# Altium PCB 01_giris.PcbDoc
Units mm, origin at the board's own origin, x right, y up, seen from the top; angles counter-clockwise.
Board outline 45 x 45 mm, 2 copper layers (Top Layer, Bottom Layer), stack 1.571 mm thick; 35 components, 24 nets, 171 pads, 32 vias.
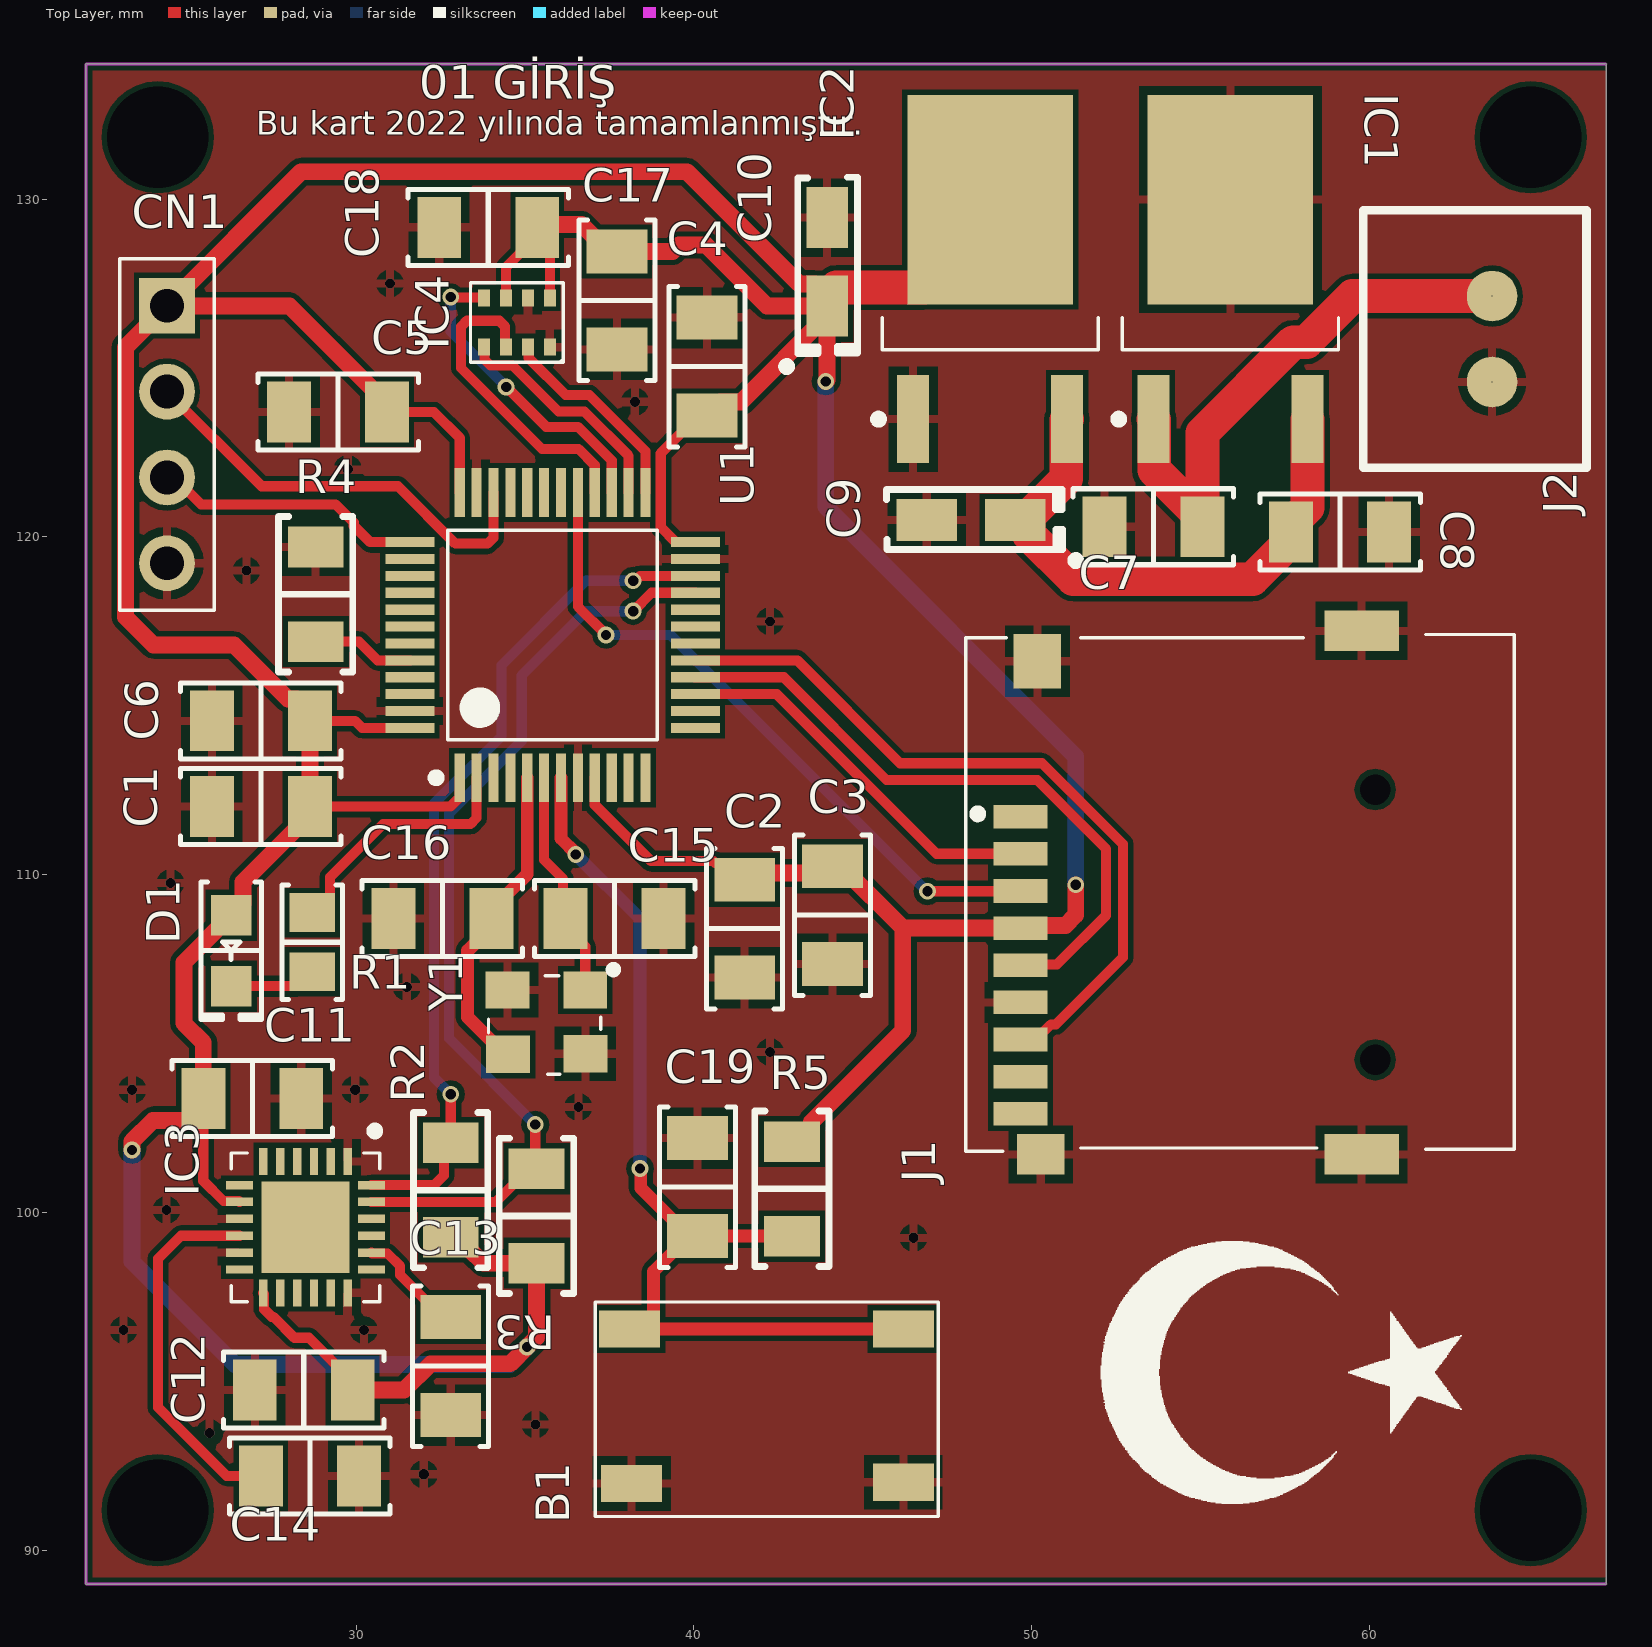
[diagram p0: Top Layer view]
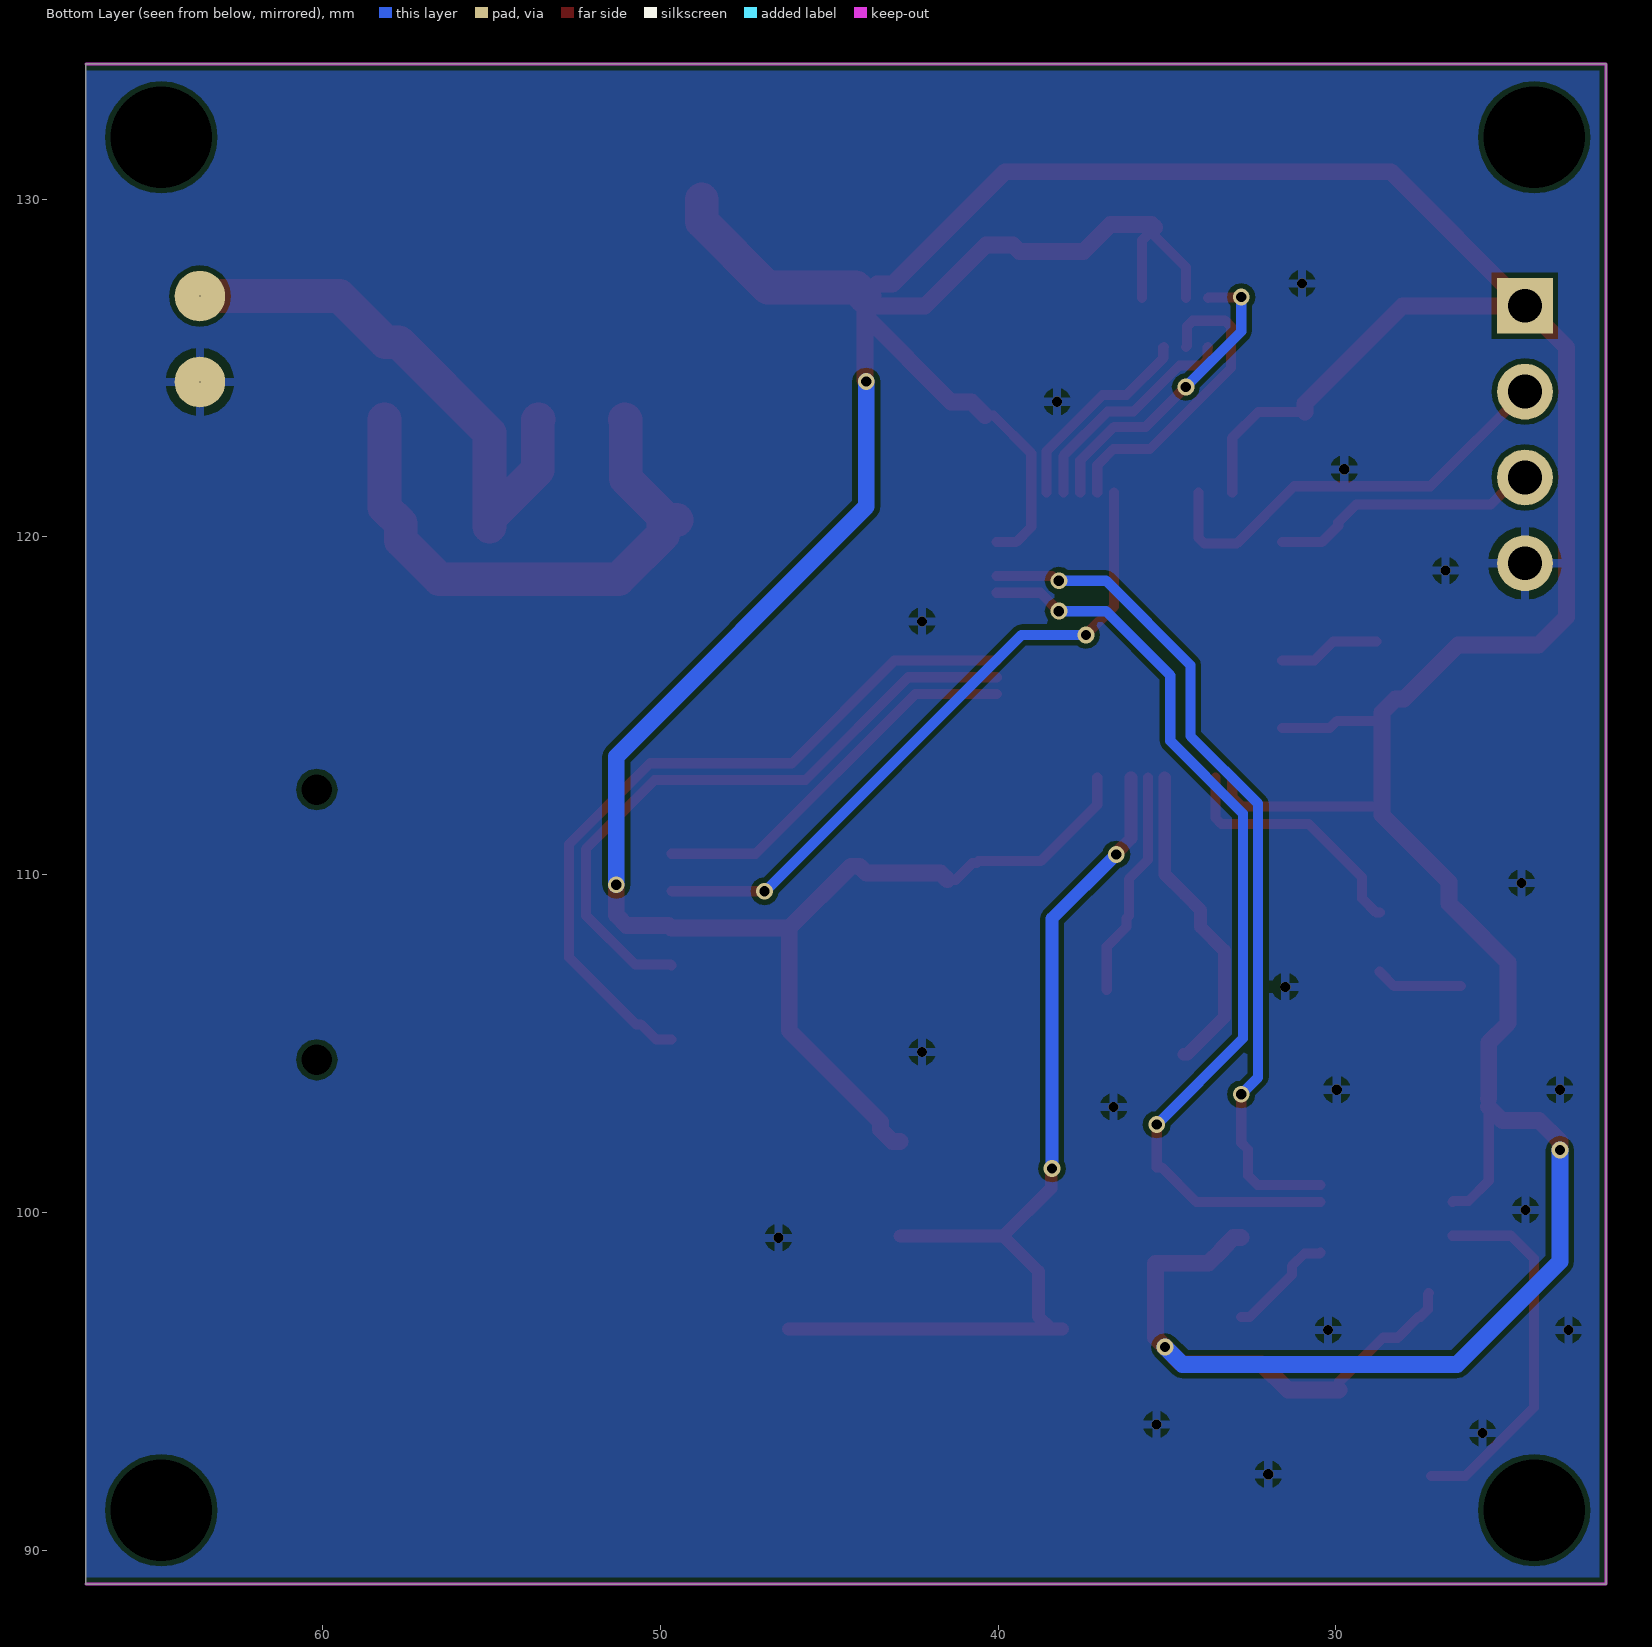
[diagram p1: Bottom Layer view, seen from below]
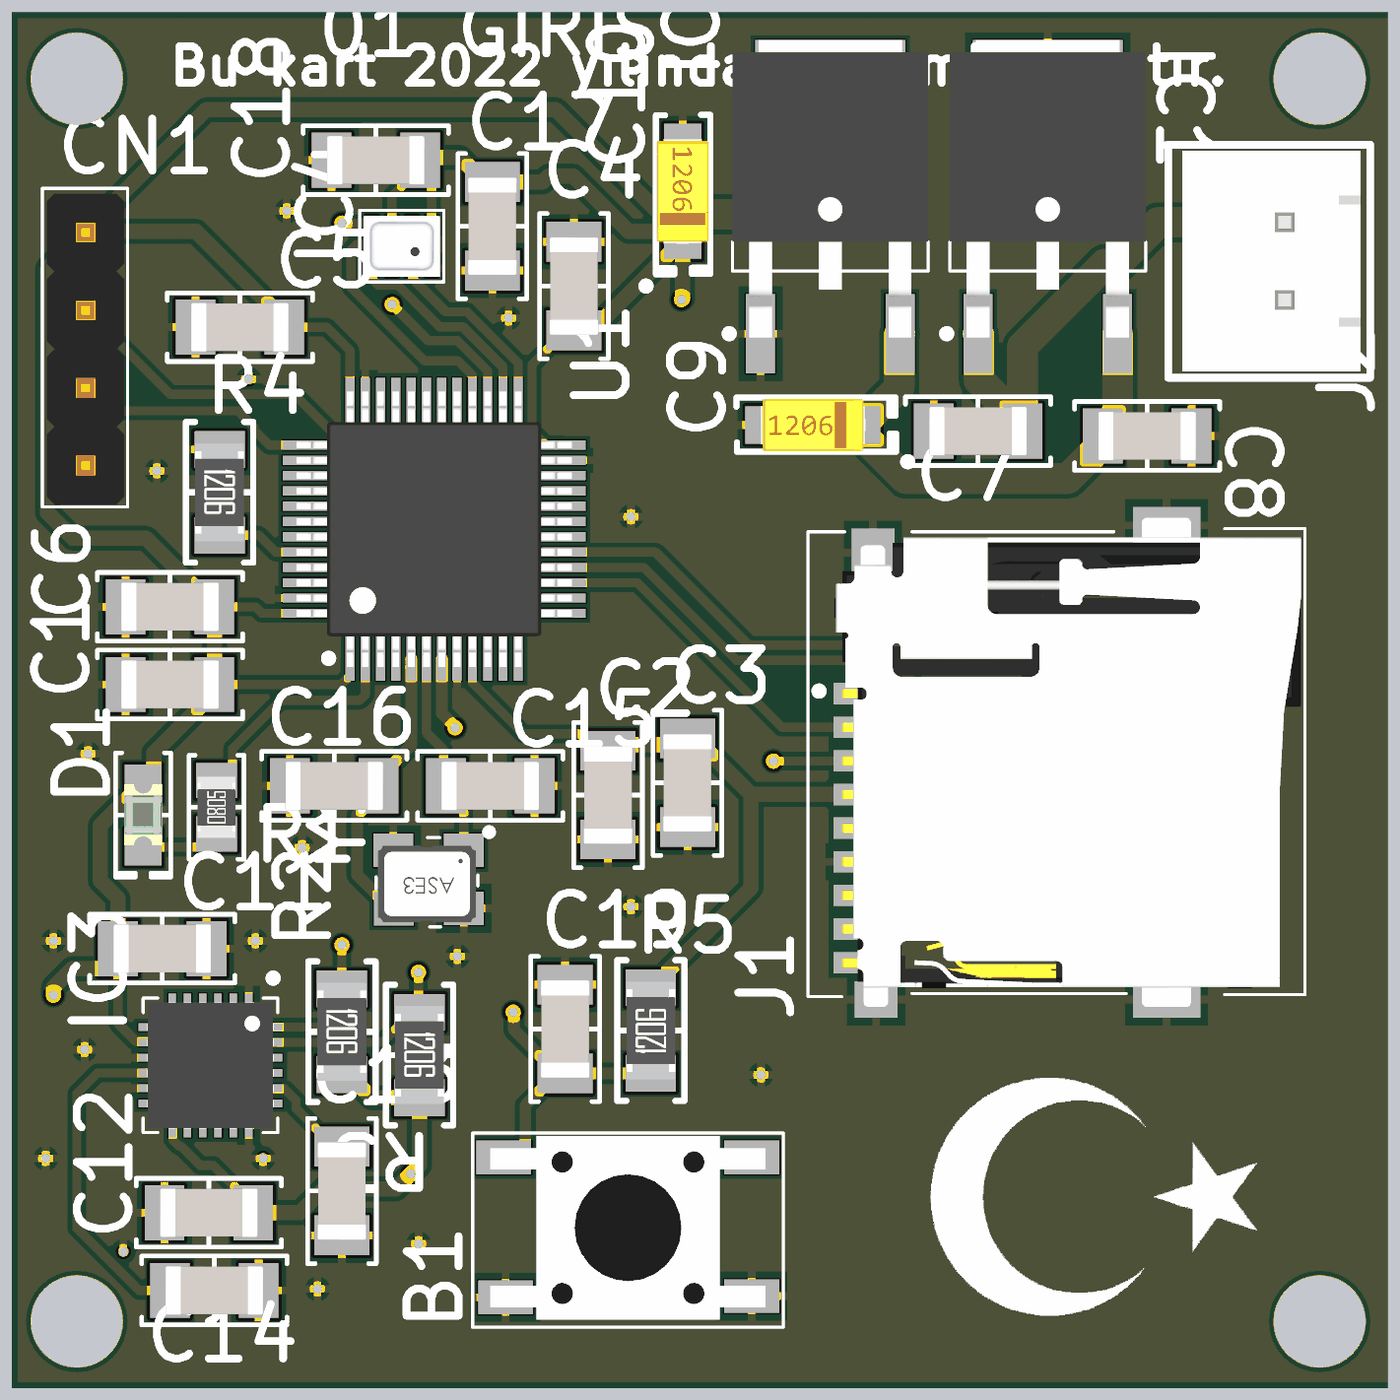
[diagram p2: 3D render of the assembled board from above, using the file's embedded part models]

## Layer stack, top to bottom
Top Solder: solder mask 0.0102, Solder Resist, Dk 3.5
Top Layer: signal copper 0.0356
Dielectric 1: dielectric 1.5, FR-4, Dk 4.8
Bottom Layer: signal copper 0.0356
Bottom Solder: solder mask 0.0102, Solder Resist, Dk 3.5

## Board outline
22,89 67,89 67,134 22,134

## Design rules (kind name [scope] priority, off if disabled: settings)
Clearance [All] p1: gap=0.152 ignorepadtopadclearanceinfootprint=FALSE
HoleSize [All] p1: absolutevalues=TRUE maxlimit=5 minlimit=0 maxpercent=80.000 minpercent=20.000
MinimumSolderMaskSliver [All] p1: minsoldermaskwidth=0.05
PolygonConnect [All] p1: connectstyle=Relief reliefconductorwidth=0.254 reliefentries=4 polygonreliefangle="90 Angle" airgapwidth=0.254
RoutingVias [All] p1: holewidth=0.75 width=0.8 viastyle="Through Hole" minholewidth=0.3 minwidth=0.5 maxholewidth=0.1 maxwidth=2
SilkToSilkClearance [All] p1: silktosilkclearance=0
SilkToSolderMaskClearance [IsPad] p1: minsilkscreentomaskgap=0 clearancetoexposedcopper=TRUE
SolderMaskExpansion [All] p1: expansion=0.102 istentingtop=FALSE
Width [All] p1: maxlimit=2 minlimit=0.152 preferedwidth=0.3 minimp=50.000000 maximp=50.000000 favimp=50.000000
26 further rules are at their usual default settings.

## Components (designator, comment, footprint, x,y, rotation, side; value= is the part's Value field where it differs from the comment)
B1 "PUSH BUTTON 2" "PUSH BUTTON 2" 41.9,94.3 r0 top
C1 "0.1 µF" "CAP 1206_3216 - 0.8MM" 27.178,112.014 r0 top
C2 "10000pF" "CAP 1206_3216 - 1.0MM" 41.5,108.4 r90 top
C3 "1 µF" "CAP 1206_3216 - 0.8MM" 44.1,108.8 r90 top
C4 "0.1 µF" "CAP 1206_3216 - 0.8MM" 40.386,125.042 r270 top
C5 "0.1 µF" "CAP 1206_3216 - 0.8MM" 29.464,123.698 r0 top
C6 "47µF" "CAP 1206_3216 - 1.8MM" 27.178,114.554 r0 top
C7 "0.33µF" "CAP 1206_3216 - 1.0MM" 53.6,120.3 r0 top
C8 "0.1 µF" "CAP 1206_3216 - 0.8MM" 59.129,120.142 r180 top
C9 "10µF" "CAP POL 1206_3216" 48.2,120.5 r180 top
C10 "10µF" "CAP POL 1206_3216" 43.942,128.143 r90 top
C11 "10000pF" "CAP 1206_3216 - 1.0MM" 26.924,103.378 r180 top
C12 "0.1 µF" "CAP 1206_3216 - 0.8MM" 28.448,94.742 r180 top
C13 "2200 pF" "CAP 1206_3216 - 0.8MM" 32.798,95.453 r270 top
C14 "0.1 µF" "CAP 1206_3216 - 0.8MM" 28.628,92.202 r0 top
C15 "16 pF" "CAP 1206_3216 - 0.8MM" 37.65,108.7 r0 top
C16 "16 pF" "CAP 1206_3216 - 0.8MM" 32.55,108.7 r180 top
C17 "0.1 µF" "CAP 1206_3216 - 0.8MM" 37.719,127 r90 top
C18 "0.1 µF" "CAP 1206_3216 - 0.8MM" 33.909,129.159 r0 top
C19 "0.1 µF" "CAP 1206_3216 - 0.8MM" 40.1,100.75 r270 top
CN1 "CONN4 MALE 1" "CONN4 MALE 1" 21.86,123.03 r90 top
D1 "Green" "LED 0805_2012 GREEN" 26.3,107.75 r270 top
IC1 "L7805" DPAK 55.88,127.635 r90 top
IC2 "LD108633" DPAK 48.768,127.635 r90 top
IC3 "MPU6050" QFN 28.5,99.562 r270 top
IC4 "BMP280" BMP280 34.909,126.3 r270 top
J1 "MIKRO SD CARD CONNECTOR" "MICRO SD CARD CONNECTOR" 56.4,109.8 r90 top
J2 "JST2" JST2 63.5,125.857 r270 top
R1 "330 Ohms" "RES 0805_2012" 28.7,108 r90 top
R2 "4.7 kOhms" "RES 1206_3216" 32.798,100.66 r270 top
R3 "4.7 kOhms" "RES 1206_3216" 35.338,99.898 r270 top
R4 "10 kOhms" "RES 1206_3216" 28.8,118.3 r270 top
R5 "10 kOhms" "RES 1206_3216" 42.9,100.7 r90 top
U1 "STM32F103 2" LQFP48 35.814,117.094 r90 top
Y1 "OSCILLATOR" OSCILLATOR 35.6,105.5 r180 top

## Footprints (in the part's own frame and the unit in brackets; to place one, negate y for a bottom-side part, rotate by r counter-clockwise, add the part's x,y. Pads: shape width x height; smd on the part's side, far side on the other; paste and mask are expansions set on the pad)
BMP280 [mm]
  rect 0.5x0.35 smd: 1(0.675,0.825) 2(0.675,0.175) 3(0.675,-0.475) 4(0.675,-1.125) 5(-0.775,-1.125) 5(-0.775,-1.125) 6(-0.775,-0.475) 7(-0.775,0.175) 8(-0.775,0.825)
  silkscreen extent -1.22,-1.53 1.12,1.22, body extent -1.05,-1.4 0.95,1.1, height 0.95
"CAP 1206_3216 - 0.8MM" [mm] "Chip Capacitor, 2-Leads, Body 3.25x1.60mm, IPC Medium Density"
  rect 1.3x1.8 smd: 1(-1.45,0) 2(1.45,0)
  silkscreen extent -2.37,-1.12 2.37,1.12, body extent -1.6,-0.8 1.6,0.8, height 0.8
"CAP 1206_3216 - 1.0MM" [mm] "Chip Capacitor, 2-Leads, Body 3.25x1.60mm, IPC Medium Density"
  rect 1.3x1.8 smd: 1(-1.45,0) 2(1.45,0)
  silkscreen extent -2.37,-1.12 2.37,1.12, body extent -1.6,-0.8 1.6,0.8, height 1
"CAP 1206_3216 - 1.8MM" [mm] "Chip Capacitor, 2-Leads, Body 3.25x1.60mm, IPC Medium Density"
  rect 1.3x1.8 smd: 1(-1.45,0) 2(1.45,0)
  silkscreen extent -2.37,-1.12 2.37,1.12, body extent -1.6,-0.8 1.6,0.8, height 1.8
"CAP POL 1206_3216" [mm] "Molded Capacitor, 2-Leads, Body 3.20x1.6mm, IPC Medium Density"
  rect 1.8x1.23 smd: 1(-1.31,0) 2(1.31,0)
  silkscreen extent -3.22,-0.9 2.5,1.32, body extent -1.72,-0.85 1.71,0.85, height 1.7
"CONN4 MALE 1" [mm] "4 PIN 2.54MM"
  rect 1.65x1.65 hole 1 mask+0: 1(3.81,-2.54)
  round 1.65 hole 1 mask+0: 2(1.27,-2.54) 3(-1.27,-2.54) 4(-3.81,-2.54)
  silkscreen extent -5.21,-3.94 5.21,-1.14, body extent -5.13,-3.83 5.03,-1.29, height 8.89
DPAK [mm] "D-PAK, 3-Pads, Body 6,20x6,56mm (max), IPC Medium Density"
  rect 2.6x0.95 smd mask+0.05: 1(-4.15,2.28) 2(-4.15,-2.28)
  rect 6.2x4.9 smd mask+0.05: 3(2.35,0)
  silkscreen extent -4.27,-3.2 -1.15,3.43, body extent -4.27,-3.2 5.45,3.2, height 3.4
JST2 [mm] "2 PIN 2.54MM"
  round 1.5 hole 0.001 mask+0.102: 1(-1.27,0.127) 2(1.27,0.127)
  silkscreen extent -3.81,-3.68 3.81,2.92, body extent -3.61,-3.23 3.61,2.62, height 7.21
"LED 0805_2012 GREEN" [mm] "Chip Diode, 2-Leads, Body 2.00x1.25mm, IPC Medium Density"
  rect 1.2x1.2 smd: 1(-1.05,0) 2(1.05,0)
  silkscreen extent -2.03,-0.9 2.03,0.9, body extent -1,-0.62 1,0.63, height 0.9
LQFP48 [mm] "TSQFP, 48-Leads, Body 7,00x7,00mm, Pitch 0,50mm, IPC Medium Density"
  rect 1.45x0.3 smd mask+0.05: 1(-4.225,2.75) 2(-4.225,2.25) 3(-4.225,1.75) 4(-4.225,1.25) 5(-4.225,0.75) 6(-4.225,0.25) 7(-4.225,-0.25) 8(-4.225,-0.75) 9(-4.225,-1.25) 10(-4.225,-1.75) 11(-4.225,-2.25) 12(-4.225,-2.75) 25(4.225,-2.75) 26(4.225,-2.25) 27(4.225,-1.75) 28(4.225,-1.25) 29(4.225,-0.75) 30(4.225,-0.25) 31(4.225,0.25) 32(4.225,0.75) 33(4.225,1.25) 34(4.225,1.75) 35(4.225,2.25) 36(4.225,2.75)
  rect 0.3x1.45 smd mask+0.05: 13(-2.75,-4.225) 14(-2.25,-4.225) 15(-1.75,-4.225) 16(-1.25,-4.225) 17(-0.75,-4.225) 18(-0.25,-4.225) 19(0.25,-4.225) 20(0.75,-4.225) 21(1.25,-4.225) 22(1.75,-4.225) 23(2.25,-4.225) 24(2.75,-4.225) 37(2.75,4.225) 38(2.25,4.225) 39(1.75,4.225) 40(1.25,4.225) 41(0.75,4.225) 42(0.25,4.225) 43(-0.25,4.225) 44(-0.75,4.225) 45(-1.25,4.225) 46(-1.75,4.225) 47(-2.25,4.225) 48(-2.75,4.225)
  silkscreen extent -4.35,-3.1 3.1,3.57, body extent -4.5,-4.5 4.5,4.5, height 1.6
"MICRO SD CARD CONNECTOR" [mm]
  rect 0.7x1.6 smd paste+0 mask+0: 1(1.918,6.735) 2(0.818,6.735) 3(-0.282,6.735) 4(-1.382,6.735) 5(-2.482,6.735) 6(-3.582,6.735) 7(-4.682,6.735) 8(-5.782,6.735) Cd(-6.882,6.735)
  rect 1.2x1.4 smd paste+0 mask+0: 10(-8.082,6.135)
  rect 1.6x1.4 smd paste+0 mask+0: 11(6.518,6.235)
  rect 1.2x2.2 smd paste+0 mask+0: 12(-8.082,-3.365) 13(7.418,-3.365)
  round 0 hole 0.9 unplated paste-1000 mask+0: ""(-5.282,-3.765) ""(2.718,-3.765)
  silkscreen extent -7.99,-7.89 7.31,8.36, body extent -8.33,-7.76 7.67,7.49, height 1.85
OSCILLATOR [mm] "8MHZ 12.5pF"
  rect 1.3x1.1 smd mask+0.05: 1(-1.181,-1.09) 2(1.119,-1.09) 3(1.103,0.817) 4(-1.186,0.801)
  silkscreen extent -2.11,-1.79 1.68,1.41, body extent -1.58,-1.24 1.62,1.26, height 1.22
"PUSH BUTTON 2" [mm]
  rect 1.8x1.1 smd mask+0.05: 1(-3.81,2.254) 2(4.3,2.254) 3(-3.748,-2.322) 4(4.3,-2.286)
  silkscreen extent -4.83,-3.3 5.33,3.05, body extent -4.25,-3.05 4.75,2.95, height 4.3
QFN [mm] "QFN, 24-Leads, Body 4,00x4,00mm, Pitch 0,50mm, Thermal Pad 2,70x2,60mm, IPC Medium Density"
  rect 0.8x0.25 smd mask+0.05: 1(-1.95,1.25) 2(-1.95,0.75) 3(-1.95,0.25) 4(-1.95,-0.25) 5(-1.95,-0.75) 6(-1.95,-1.25) 13(1.95,-1.25) 14(1.95,-0.75) 15(1.95,-0.25) 16(1.95,0.25) 17(1.95,0.75) 18(1.95,1.25)
  rect 0.25x0.8 smd mask+0.05: 7(-1.25,-1.95) 8(-0.75,-1.95) 9(-0.25,-1.95) 10(0.25,-1.95) 11(0.75,-1.95) 12(1.25,-1.95) 19(1.25,1.95) 20(0.75,1.95) 21(0.25,1.95) 22(-0.25,1.95) 23(-0.75,1.95) 24(-1.25,1.95)
  rect 2.7x2.6 smd mask+0.05: 25(0,0)
  silkscreen extent -2.97,-2.2 2.2,2.2, body extent -2.07,-2.07 2.07,2.07, height 0.95
"RES 0805_2012" [mm] "Chip Resistor, 2-Leads, Body 2.00x1.25mm, IPC Medium Density"
  rect 1.15x1.35 smd: 1(-0.875,0) 2(0.875,0)
  silkscreen extent -1.7,-0.9 1.7,0.9, body extent -1,-0.62 1,0.63, height 0.6
"RES 1206_3216" [mm] "Chip Resistor, 2-Leads, Body 3.13x1.55mm, IPC Medium Density"
  rect 1.2x1.65 smd: 1(-1.4,0) 2(1.4,0)
  silkscreen extent -2.3,-1.1 2.3,1.1, body extent -1.6,-0.8 1.6,0.8, height 0.6

## Part data
C1 C4 C5 C8 C12 C14 C17 C18 C19: library part 1206B104M500CT, "CAP CER 0.1UF 50V X7R 1206", Device Package="1206 (3216 Metric)", manufacturer="Walsin Technology Corporation", Operating Temperature="-55°C ~ 125°C", Supplier Part Number 1=1292-1606-1-ND, Temperature Coefficient=X7R, Tolerance=±20%, Voltage - Rated=50V, Applications="General Purpose", Capacitance="0.1 µF", componentlink1description=Datasheet, componentlink1url=http://www.passivecomponent.com/wp-content/uploads/2018/10/MLCC.pdf, componentlink2description="DigiKey Link", componentlink2url=https://www.digikey.com/en/products/detail/walsin-technology-corporation/1206B104M500CT/9355103, lastupdated="2.04.2022 06:00:47", Lifecycle Status=Active, Minimum Order=1, Mounting Type="Surface Mount, MLCC", Package / Case="1206 (3216 Metric)", packaging=TapeAndReel, Part Number=1206B104M500CT, Part Status=Active, partid=41385, price=0.02, series=-, Size / Dimension="0.126\" L x 0.063\" W (3.20mm x 1.60mm)", Supplier 1=DigiKey, Thickness (Max)="0.035\" (0.90mm)"
C2 C11: library part 12065C103K4T2A, "CAP CER 10000PF 50V X7R 1206", Device Package="1206 (3216 Metric)", manufacturer="AVX Corporation", Operating Temperature="-55°C ~ 125°C", Ratings=AEC-Q200, Supplier Part Number 1=478-12828-1-ND, Temperature Coefficient=X7R, Tolerance=±10%, Voltage - Rated=50V, Applications=Automotive, Capacitance=10000pF, componentlink1description=Datasheet, componentlink1url=http://datasheets.avx.com/AutoMLCC.pdf, componentlink2description="DigiKey Link", componentlink2url=http://digikey.com/product-detail/en/avx-corporation/12065C103K4T2A/478-12828-1-ND/9949472, lastupdated="2.09.2020 01:05:05", Lifecycle Status=Active, Minimum Order=1, Mounting Type="Surface Mount, MLCC", Package / Case="1206 (3216 Metric)", packaging=TapeAndReel, Part Number=12065C103K4T2A, Part Status=Active, partid=19150, price=0.06, series=-, Size / Dimension="0.126\" L x 0.063\" W (3.20mm x 1.60mm)", Supplier 1=DigiKey, Thickness (Max)="0.037\" (0.94mm)"
C3: library part C1206X105K3RAC3316, "CAP CER 1206 1UF 25V X7R", Device Package="1206 (3216 Metric)", manufacturer=KEMET, Operating Temperature="-55°C ~ 125°C", Ratings=AEC-Q200, Supplier Part Number 1=399-C1206X105K3RAC3316CT-ND, Temperature Coefficient=X7R, Tolerance=±10%, Voltage - Rated=25V, Applications="Automotive, Boardflex Sensitive", Capacitance="1 µF", componentlink1description=Datasheet, componentlink1url=https://api.kemet.com/component-edge/download/datasheet/C1206X105K3RAC3316.pdf, componentlink2description="DigiKey Link", componentlink2url=https://www.digikey.com/en/products/detail/kemet/C1206X105K3RAC3316/10315781, Features="Soft Termination", lastupdated="2.04.2022 06:00:41", Lifecycle Status=Active, Minimum Order=1, Mounting Type="Surface Mount, MLCC", Package / Case="1206 (3216 Metric)", packaging=TapeAndReel, Part Number=C1206X105K3RAC3316, Part Status=Active, partid=19010, price=0.32, series="SMD Auto X7R VW80808", Size / Dimension="0.130\" L x 0.063\" W (3.30mm x 1.60mm)", Supplier 1=DigiKey, Thickness (Max)="0.047\" (1.20mm)"
C6: library part 12066D476MAT2A, "CAP CER 47UF 6.3V X5R 1206", Device Package="1206 (3216 Metric)", manufacturer="AVX Corporation", Operating Temperature="-55°C ~ 85°C", Supplier Part Number 1=478-4532-1-ND, Temperature Coefficient=X5R, Tolerance=±20%, Voltage - Rated=6.3V, Applications="General Purpose", Capacitance=47µF, componentlink1description=Datasheet, componentlink1url=http://datasheets.avx.com/cx5r.pdf, componentlink2description="DigiKey Link", componentlink2url=http://digikey.com/product-detail/en/avx-corporation/12066D476MAT2A/478-4532-1-ND/1645883, lastupdated="2.09.2020 01:05:23", Lifecycle Status=Active, Minimum Order=1, Mounting Type="Surface Mount, MLCC", Package / Case="1206 (3216 Metric)", packaging=TapeAndReel, Part Number=12066D476MAT2A, Part Status=Active, partid=22636, price=0.23, series=-, Size / Dimension="0.126\" L x 0.063\" W (3.20mm x 1.60mm)", Supplier 1=DigiKey, Thickness (Max)="0.070\" (1.78mm)"
C7: library part 12065E334MAT2A, "CAP CER 0.33UF 50V Z5U 1206", Device Package="1206 (3216 Metric)", manufacturer="AVX Corporation", Operating Temperature="10°C ~ 85°C", Supplier Part Number 1=478-11633-1-ND, Temperature Coefficient=Z5U, Tolerance=±20%, Voltage - Rated=50V, Applications="General Purpose", Capacitance=0.33µF, componentlink1description=Datasheet, componentlink1url=//media.digikey.com/pdf/Data%20Sheets/AVX%20PDFs/Z5U_Dielectric.pdf, componentlink2description="DigiKey Link", componentlink2url=http://digikey.com/product-detail/en/avx-corporation/12065E334MAT2A/478-11633-1-ND/8564191, lastupdated="2.09.2020 01:05:04", Lifecycle Status=Active, Minimum Order=1, Mounting Type="Surface Mount, MLCC", Package / Case="1206 (3216 Metric)", packaging=TapeAndReel, Part Number=12065E334MAT2A, Part Status=Active, partid=19457, price=0.08, series=-, Size / Dimension="0.126\" L x 0.063\" W (3.20mm x 1.60mm)", Supplier 1=DigiKey, Thickness (Max)="0.037\" (0.94mm)"
C9 C10: library part F951E106MAAAQ2, "CAP TANT 10UF 20% 25V 1206", Device Package="1206 (3216 Metric)", ESR (Equivalent Series Resistance)=2Ohm, manufacturer="AVX Corporation", Manufacturer Size Code=A, Operating Temperature="-55°C ~ 125°C", Supplier Part Number 1=478-8496-1-ND, Tolerance=±20%, Voltage - Rated=25V, Capacitance=10µF, componentlink1description=Datasheet, componentlink1url=http://datasheets.avx.com/F95.pdf, componentlink2description="DigiKey Link", componentlink2url=http://digikey.com/product-detail/en/avx-corporation/F951E106MAAAQ2/478-8496-1-ND/4005728, Features="General Purpose", Height - Seated (Max)="0.063\" (1.60mm)", lastupdated="2.09.2020 01:15:59", Lifecycle Status=Active, Minimum Order=1, Mounting Type="Surface Mount", Package / Case="1206 (3216 Metric)", packaging=TapeAndReel, Part Number=F951E106MAAAQ2, Part Status=Active, partid=173, price=0.28, series="F95, Frameless™", Size / Dimension="0.126\" L x 0.067\" W (3.20mm x 1.70mm)", Supplier 1=DigiKey, Type="Conformal Coated"
C13: library part CL31C222JBCNNNC, "CAP CER 2200PF 50V C0G/NP0 1206", Device Package="1206 (3216 Metric)", manufacturer="Samsung Electro-Mechanics", Operating Temperature="-55°C ~ 125°C", Supplier Part Number 1=1276-2823-1-ND, Temperature Coefficient="C0G, NP0", Tolerance=±5%, Voltage - Rated=50V, Applications="General Purpose", Capacitance="2200 pF", componentlink1description=Datasheet, componentlink1url=http://www.samsungsem.com/kr/support/product-search/mlcc/CL31C222JBCNNNC.jsp, componentlink2description="DigiKey Link", componentlink2url=https://www.digikey.com/en/products/detail/samsung-electro-mechanics/CL31C222JBCNNNC/3888481, lastupdated="2.04.2022 06:00:39", Lifecycle Status=Active, Minimum Order=1, Mounting Type="Surface Mount, MLCC", Package / Case="1206 (3216 Metric)", packaging=TapeAndReel, Part Number=CL31C222JBCNNNC, Part Status=Active, partid=19911, price=0.05, series=CL, Size / Dimension="0.126\" L x 0.063\" W (3.20mm x 1.60mm)", Supplier 1=DigiKey, Thickness (Max)="0.039\" (1.00mm)"
C15 C16: library part C1206C160J5GAC7800, "CAP CER 16PF 50V NP0 1206", Device Package="1206 (3216 Metric)", manufacturer=KEMET, Operating Temperature="-55°C ~ 125°C", Supplier Part Number 1=399-17465-1-ND, Temperature Coefficient="C0G, NP0", Tolerance=±5%, Voltage - Rated=50V, Applications="General Purpose", Capacitance="16 pF", componentlink1description=Datasheet, componentlink1url=https://api.kemet.com/component-edge/download/datasheet/C1206C160J5GACTU.pdf, componentlink2description="DigiKey Link", componentlink2url=https://www.digikey.com/en/products/detail/kemet/C1206C160J5GAC7800/2215316, Features="Low ESL", lastupdated="2.04.2022 06:00:48", Lifecycle Status=Active, Minimum Order=1, Mounting Type="Surface Mount, MLCC", Package / Case="1206 (3216 Metric)", packaging=TapeAndReel, Part Number=C1206C160J5GAC7800, Part Status=Active, partid=40774, price=0.08, series="SMD Comm C0G", Size / Dimension="0.126\" L x 0.063\" W (3.20mm x 1.60mm)", Supplier 1=DigiKey, Thickness (Max)="0.035\" (0.88mm)"
CN1: "4 PIN 2.54MM"
D1: library part 5975316507F, "LED GREEN 0805 SMD", Current - Test=20mA, Device Package="0805 (2012 Metric)", Lens Color=0.93mm, manufacturer=Dialight, Millicandela Rating=16mcd, Supplier Device Package=0805, Supplier Part Number 1=350-4389-1-ND, Voltage - Forward (Vf) (Typ)=2.2V, Color=Green, componentlink1description=Datasheet, componentlink1url=http://www.dialightsignalsandcomponents.com/Assets/Drawings/2D_Drawings_DrawingDetailedSpec/NewDrawings/18370A.pdf, componentlink2description="DigiKey Link", componentlink2url=https://www.digikey.com/en/products/detail/dialight/5975316507F/9385444, Configuration=Standard, Height (Max)=0.93mm, lastupdated="2.04.2022 06:37:24", Lens Size="1.40mm x 1.24mm", Lens Style="Rectangle with Flat Top", Lifecycle Status=Active, Minimum Order=1, Mounting Type="Surface Mount", Package / Case="0805 (2012 Metric)", packaging=TapeAndReel, Part Number=5975316507F, Part Status=Active, partid=245, price=0.13, series=597, Size / Dimension="2.00mm L x 1.25mm W", Supplier 1=DigiKey, Wavelength - Dominant=560nm
IC1: "IC-7805 V.REG.+5V 1.5A DPAK TO252"
IC2: "IC-1086 V.REG LDO 3.3V 1.5A TO-252 (DPAK)"
IC3: "IC-6050 SENSOR MOTION QFN24"
J2: "2 PIN 2.54MM"
R1: library part AC0805FR-07330RL, "RES SMD 330 OHM 1% 1/8W 0805", Device Package="0805 (2012 Metric)", manufacturer=Yageo, Operating Temperature="-55°C ~ 155°C", Power (Watts)="0.125W, 1/8W", Ratings=AEC-Q200, Supplier Device Package=0805, Supplier Part Number 1=YAG3725CT-ND, Temperature Coefficient=±100ppm/°C, Tolerance=±1%, componentlink1description=Datasheet, componentlink1url=https://www.yageo.com/upload/media/product/productsearch/datasheet/rchip/PYu-AC_51_RoHS_L_7.pdf, componentlink2description="DigiKey Link", componentlink2url=https://www.digikey.com/en/products/detail/yageo/AC0805FR-07330RL/5896770, Composition="Thick Film", Features="Automotive AEC-Q200, Moisture Resistant", Height - Seated (Max)="0.024\" (0.60mm)", lastupdated="2.04.2022 06:25:37", Lifecycle Status=Active, Minimum Order=1, Number of Terminations=2, Package / Case="0805 (2012 Metric)", packaging=TapeAndReel, Part Number=AC0805FR-07330RL, Part Status=Active, partid=45310, price=0.01, Resistance="330 Ohms", series=AC, Size / Dimension="0.079\" L x 0.049\" W (2.00mm x 1.25mm)", Supplier 1=DigiKey
R2 R3: library part TNPW12064K70BEEA, "RES 4.7K OHM 0.1% 2/5W 1206", Device Package="1206 (3216 Metric)", manufacturer="Vishay Dale", Operating Temperature="-55°C ~ 155°C", Power (Watts)="0.4W, 2/5W", Ratings=AEC-Q200, Supplier Device Package=1206, Supplier Part Number 1=541-3881-1-ND, Temperature Coefficient=±25ppm/°C, Tolerance=±0.1%, componentlink1description=Datasheet, componentlink1url=http://www.vishay.com/docs/28758/tnpw_e3.pdf, componentlink2description="DigiKey Link", componentlink2url=https://www.digikey.com/en/products/detail/vishay-dale/TNPW12064K70BEEA/1607929, Composition="Thin Film", Features="Anti-Sulfur, Automotive AEC-Q200, Moisture Resistant", Height - Seated (Max)="0.026\" (0.65mm)", lastupdated="2.04.2022 06:19:59", Lifecycle Status=Active, Minimum Order=1, Number of Terminations=2, Package / Case="1206 (3216 Metric)", packaging=TapeAndReel, Part Number=TNPW12064K70BEEA, Part Status=Active, partid=35087, price=0.20, Resistance="4.7 kOhms", series="TNPW e3", Size / Dimension="0.126\" L x 0.063\" W (3.20mm x 1.60mm)", Supplier 1=DigiKey
R4 R5: library part CRCW120610K0FKTA, "RES SMD 10K OHM 1% 1/4W 1206", Device Package="1206 (3216 Metric)", manufacturer="Vishay Dale", Operating Temperature="-55°C ~ 155°C", Power (Watts)="0.25W, 1/4W", Ratings=AEC-Q200, Supplier Device Package=1206, Supplier Part Number 1=541-CRCW120610K0FKTACT-ND, Temperature Coefficient=±100ppm/°C, Tolerance=±1%, componentlink1description=Datasheet, componentlink1url=http://www.vishay.com/docs/20008/dcrcw.pdf, componentlink2description="DigiKey Link", componentlink2url=http://digikey.com/product-detail/en/vishay-dale/CRCW120610K0FKTA/541-CRCW120610K0FKTACT-ND/11500860, Composition="Thick Film", Features="Automotive AEC-Q200", lastupdated="2.04.2022 06:19:13", Lifecycle Status=Active, Minimum Order=1, Number of Terminations=2, Package / Case="1206 (3216 Metric)", packaging=TapeAndReel, Part Number=CRCW120610K0FKTA, partid=57020, price=0.02, Resistance="10 kOhms", series=CRCW, Supplier 1=DigiKey
Y1: "8MHZ 12.5pF"

## Free pads (board coordinates)
  round 0 hole 3: 3(24.13,91.186) 3(24.13,131.826) 3(64.77,91.186) 3(64.77,131.826)

## Via types
v1: diameter 0.3, hole 0.3, Top Layer to Bottom Layer, 18 vias
v2: diameter 0.5, hole 0.3, Top Layer to Bottom Layer, 14 vias

## Nets (pads, with @x,y where several pads share a name; then routed paths per layer and width w, separated by ;. In a path a pad name is that pad's centre, name@x,y a point inside that pad or via, vN(x,y) a via of type N, cw(c..) or ccw(c..) an arc to the next point about the centre after c; other vN are vias at no path point)
+3V3: C1.2 C2.2 C3.2 C4.2 C5.2 C6.2 C10.1 C11.2 C12.1 C17.2 C18.2 CN1.1 D1.1 IC2.3 IC3.8 IC3.13 IC4.6 IC4.8 J1.4 R2.2 R3.2 R5.2 U1.1 U1.9 U1.24 U1.36 U1.48 | length 188
  Top Layer w0.3: C11.2 25.474,103.128 25.474,100.936 26.073,100.337 26.525,100.337 IC3.8 ; IC3.13 27.275,97.587 27.275,97.135 27.5,96.91 27.55,96.91 28.171,96.289 28.601,96.289 29.898,94.992 C12.1 ; C1.2 32.784,112.014 33.064,112.294 U1.1 ; C6.2 29.966,114.554 30.176,114.344 U1.48 ; C5.2 32.298,123.698 33.064,122.932 U1.36 ; IC4.6 34.434,127.984 35.359,128.909 C18.2 35.734,128.784 IC4.8 ; U1.9 37.064,112.067 38.731,110.4 40.574,110.4 40.624,110.35 40.75,110.35 41.25,109.85 C2.2 ; U1.24 39.464,119.844 39.016,120.292 39.016,122.472 40.136,123.592 C4.2
  Top Layer w0.5: v2(23.368,101.854) 23.368,102.108 23.988,102.728 25.074,102.728 C11.2@25.474,103.128 ; C11.2 25.472,103.38 25.472,105.028 24.9,105.6 24.9,107.4 D1.1 26.65,109.15 26.65,109.786 28.628,111.764 C1.2 C6.2 28.628,114.804 28.228,115.204 27.978,115.204 26.382,116.8 24,116.8 23.173,117.627 23.173,125.613 CN1.1 ; C12.1 31.418,94.742 32.196,95.52 34.56,95.52 v2(35.052,96.012) 35.338,96.298 R3.2 33.763,98.498 33.373,98.888 33.373,98.91 33.023,99.26 R2.2 ; C5.2 30.914,123.948 28.022,126.84 CN1.1 ; C18.2 35.45,129.25 36.669,129.25 37.469,128.45 C17.2 39.369,128.45 39.56,128.641 40.355,128.641 42.164,126.833 C10.1 ; C4.2 40.786,123.992 41.386,123.992 C10.1@43.942,126.548 ; C2.2 41.7,110.05 43.9,110.05 C3.2 44.35,110.25 46.182,108.418 ; R5.2 43.125,102.1 43.475,102.45 43.475,102.675 46.182,105.382 46.182,108.418 ; v2(43.9,124.6) 43.942,124.642 C10.1@43.942,126.548 ; v2(51.3,109.7) 51.3,108.8 51,108.5 49.747,108.5 J1.4 46.182,108.418 ; CN1.1 28.37,130.81 39.79,130.81 43.117,127.483 43.577,127.483 43.942,127.118 C10.1 ; C10.1@43.942,126.548 C10.1
  Top Layer w1: C10.1@43.942,127.118 44.209,127.385 46.818,127.385 48.768,129.335 IC2.3
  Bottom Layer w0.5: v2(23.368,101.854) 23.368,98.552 26.416,95.504 34.544,95.504 v2(35.052,96.012) ; v2(43.9,124.6) 43.9,120.9 51.3,113.5 v2(51.3,109.7)
+5: C8.2 C9.1 IC1.2 IC2.2 | length 16.9
  Top Layer w1: C9.1 C9.1@49.795,120.5 ; IC2.2 51.023,123.46 51.023,121.728 C9.1@49.795,120.5 ; IC1.2 58.16,120.873 57.679,120.392 C8.2 57.679,119.892 56.535,118.748 51.23,118.748 49.91,120.068 49.91,120.385 C9.1@49.795,120.5
GND: B1.3 B1.4 C1.1 C2.1 C3.1 C4.1 C5.1 C6.1 C7.1 C8.1 C9.2 C10.2 C11.1 C12.2 C13.2 C14.2 C15.2 C16.2 C17.1 C18.1 C19.1 CN1.4 IC1.3 IC2.1 IC3.1 IC3.9 IC3.11 IC3.18 IC4.1 IC4.7 J1.6 J1.10 J1.11 J1.12 J1.13 J2.2 R4.1 U1.8 U1.23 U1.35 U1.47 Y1.2 Y1.4
  other v1: 32,92.25 25.654,93.472 35.306,93.726 23.114,96.52 30.226,96.52 46.5,99.25 24.384,100.076 36.576,103.124 23.368,103.632 29.972,103.632 42.25,104.75 31.496,106.68 24.5,109.75 42.25,117.5 26.75,119 29.75,122 38.25,124 31,127.5
NetB1_1: B1.1 B1.2 C19.2 R5.1 U1.7 | length 29.6
  Top Layer w0.381: U1.7 36.064,111.068 36.5,110.632 v2(36.5,110.6) ; B1.1 B1.1@38.44,96.554 ; v2(38.4,101.3) 38.423,101.277 38.423,100.727 C19.2@39.85,99.3 ; R5.1 C19.2 C19.2@39.85,99.3 ; B1.2 B1.1@38.44,96.554 ; B1.1@38.44,96.554 38.8,96.914 38.8,98.249 C19.2@39.85,99.3
  Bottom Layer w0.381: v2(36.5,110.6) 38.4,108.7 v2(38.4,101.3)
NetC13_1: C13.1 IC3.20 | length 3.3
  Top Layer w0.3: IC3.20 30.475,98.787 30.927,98.787 31.3,98.414 31.3,98.151 32.548,96.903 C13.1
NetC14_1: C14.1 IC3.10 | length 11
  Top Layer w0.3: IC3.10 24.812,99.312 24.13,98.63 24.13,94.234 26.162,92.202 C14.1
NetC15_1: C15.1 U1.6 Y1.1 | length 6.8
  Top Layer w0.3: U1.6 35.564,110.436 36.126,109.874 36.126,108.774 C15.1 36.2,108.45 36.781,107.869 Y1.1
NetC16_1: C16.1 U1.5 Y1.3 | length 9.5
  Top Layer w0.381: Y1.3 34.397,104.683 33.3,105.779 33.3,107.75 34,108.45 34,108.95 34.46,109.41 35.064,110.014 U1.5
NetCN1_2: CN1.2 U1.34 | length 12.9
  Top Layer w0.3: CN1.2 27.2,121.5 31.235,121.5 32.935,119.8 33.888,119.8 34.064,119.976 U1.34
NetCN1_3: CN1.3 U1.37 | length 8
  Top Layer w0.3: CN1.3 24.61,121.76 25.407,120.963 29.389,120.963 29.927,120.425 29.927,120.331 30.414,119.844 U1.37
NetD1_2: D1.2 R1.1 | length 2.6
  Top Layer w0.3: D1.2 28.275,106.7 R1.1
NetJ1_2: J1.2 U1.15 | length 11.6
  Top Layer w0.3: U1.15 42.452,115.344 47.177,110.618 J1.2
NetJ1_3: J1.3 U1.29 | length 20
  Top Layer w0.3: U1.29 36.564,117.936 v2(37.4,117.1) ; v2(46.909,109.509) 49.656,109.509 J1.3
  Bottom Layer w0.3: v2(37.4,117.1) 39.3,117.1 46.891,109.509 v2(46.909,109.509)
NetJ1_5: J1.5 U1.16 | length 19.4
  Top Layer w0.3: U1.16 42.656,115.844 45.7,112.8 50.161,112.8 52.2,110.761 52.2,108.8 50.74,107.34 49.687,107.34 J1.5
NetJ1_7: J1.7 U1.17 | length 22.3
  Top Layer w0.3: U1.17 43.056,116.344 46.1,113.3 50.3,113.3 52.7,110.9 52.7,107.555 50.711,105.566 50.563,105.566 50.115,105.118 J1.7
NetR1_2: R1.2 U1.2 | length 7.6
  Top Layer w0.3: R1.2 28.8,108.875 29.225,109.3 29.225,109.925 30.8,111.5 33.388,111.5 33.564,111.676 U1.2
NetR2_1: IC3.24 R2.1 U1.22 | length 25.3
  Top Layer w0.3: IC3.24 32.312,100.812 32.6,101.1 32.6,101.862 32.8,102.062 v2(32.8,103.5) ; v2(38.2,118.7) 38.254,118.7 38.398,118.844 U1.22
  Bottom Layer w0.3: v2(32.8,103.5) 32.3,104 32.3,112.1 34.3,114.1 34.3,116.2 36.8,118.7 v2(38.2,118.7)
NetR3_1: IC3.23 R3.1 U1.21 | length 27.9
  Top Layer w0.3: IC3.23 34.127,100.312 35.151,101.336 35.3,101.336 v2(35.3,102.6) ; v2(38.2,117.8) 38.744,118.344 U1.21
  Bottom Layer w0.3: v2(35.3,102.6) 32.752,105.148 32.752,111.813 34.9,113.961 34.9,115.9 36.8,117.8 v2(38.2,117.8)
NetR4_2: R4.2 U1.44 | length 3
  Top Layer w0.3: R4.2 30.075,116.9 30.631,116.344 U1.44
NetU1_25: IC4.2 U1.25 | length 6.2
  Top Layer w0.3: IC4.2 35.109,125.6 35.109,125.291 36.2,124.2 36.903,124.2 38.564,122.539 U1.25
NetU1_26: IC4.4 U1.26 | length 6.9
  Top Layer w0.3: IC4.4 33.8,125.609 33.8,125.249 33.976,125.073 34.627,125.073 35.991,123.709 36.754,123.709 38.064,122.4 U1.26
NetU1_27: IC4.5 U1.27 | length 9.3
  Top Layer w0.3: v2(32.8,127.1) 32.813,127.087 33.771,127.087 IC4.5@33.784,127.075 ; v2(34.44,124.44) 35.623,123.257 36.567,123.257 37.564,122.26 U1.27
  Bottom Layer w0.3: v2(32.8,127.1) 32.8,126.081 v2(34.44,124.44)
NetU1_28: IC4.3 U1.28 | length 9.2
  Top Layer w0.3: IC4.3 34.409,125.65 34.409,126.224 34.233,126.4 33.276,126.4 33.1,126.224 33.1,125 35.5,122.6 36.585,122.6 37.064,122.121 U1.28
VIN: C7.2 IC1.1 J2.1 | length 16.6
  Top Layer w1: IC1.1 53.625,123.46 53.625,121.975 C7.2@55.05,120.55 ; C7.2 C7.2@55.05,120.55 ; J2.1 59.494,127.127 58.129,125.762 57.74,125.762 55.05,123.072 C7.2@55.05,120.55
pads on no net: IC3.2 IC3.3 IC3.4 IC3.5 IC3.6 IC3.7 IC3.12 IC3.14 IC3.15 IC3.16 IC3.17 IC3.19 IC3.21 IC3.22 IC3.25 J1. J1.1 J1.8 J1.Cd U1.3 U1.4 U1.10 U1.11 U1.12 U1.13 U1.14 U1.18 U1.19 U1.20 U1.30 U1.31 U1.32 U1.33 U1.38 U1.39 U1.40 U1.41 U1.42 U1.43 U1.45 U1.46

## Polygon pours and split planes (outlines as drawn)
GND on Top Layer "NONET_L-01_P-001" (solid, remove dead copper, pour order 0): 22,134 67,134 67,89 22,89
GND on Bottom Layer "NONET_L-01_P-001" (solid, remove dead copper, pour order 1): 22,134 67,134 67,89 22,89

## Keep-outs
Keep-Out Layer:
  lines w0.1: 67,89 22,89 22,134 67,134

## Silkscreen, mask and mechanical layers (free items; w line width, h text height)
Top Overlay:
  drawing of 2 lines, arcs and shapes, not listed
  text "01 GİRİŞ" at 31.871,132.641 h1.7
  text "Bu kart 2022 yılında tamamlanmıştır." at 27.039,131.675 h1.2